# Altium PCB ArrowHheldPCB.PcbDoc
Units mm, origin at the board's own origin, x right, y up, seen from the top; angles counter-clockwise.
Board outline 40 x 55 mm, 2 copper layers (Top Layer, Bottom Layer), stack 1.569 mm thick; 42 components, 37 nets, 157 pads, 81 vias.
Unrouted connection lines stored in the file: 20.
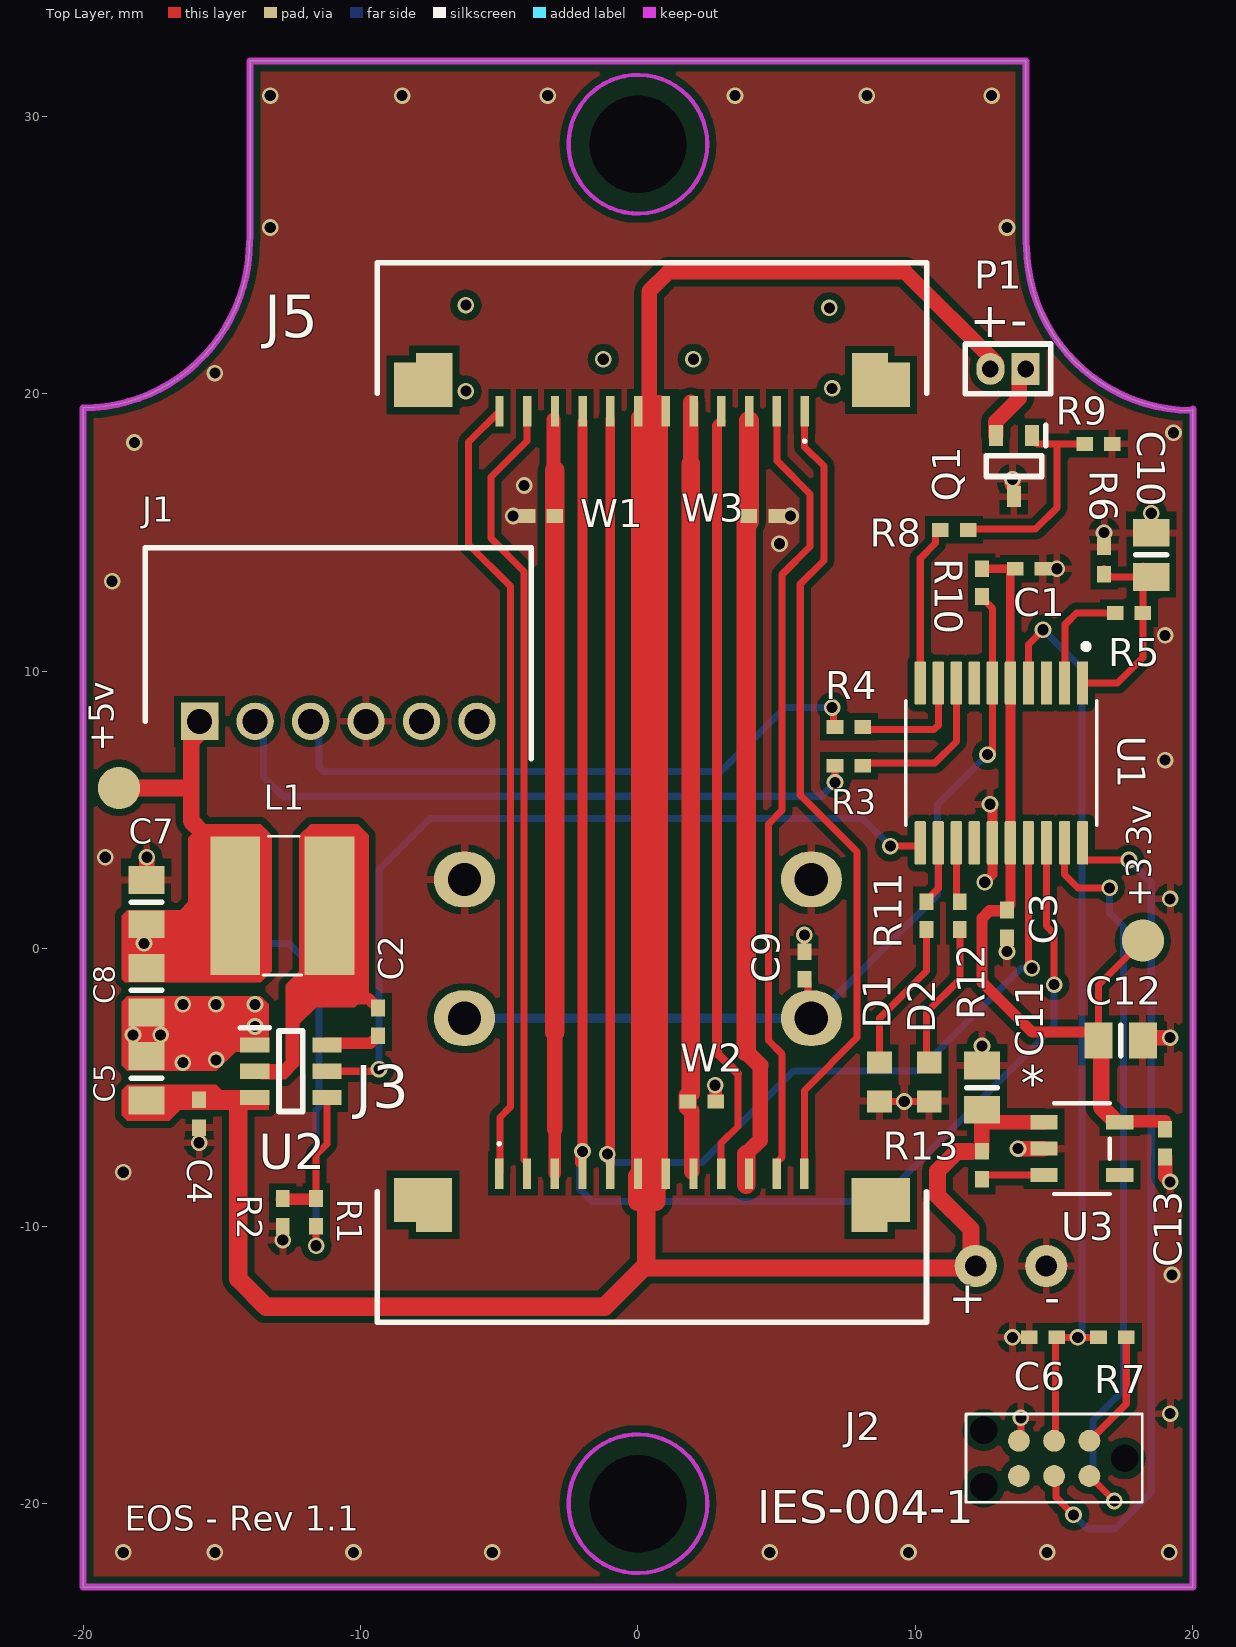
[diagram p0: Top Layer view]
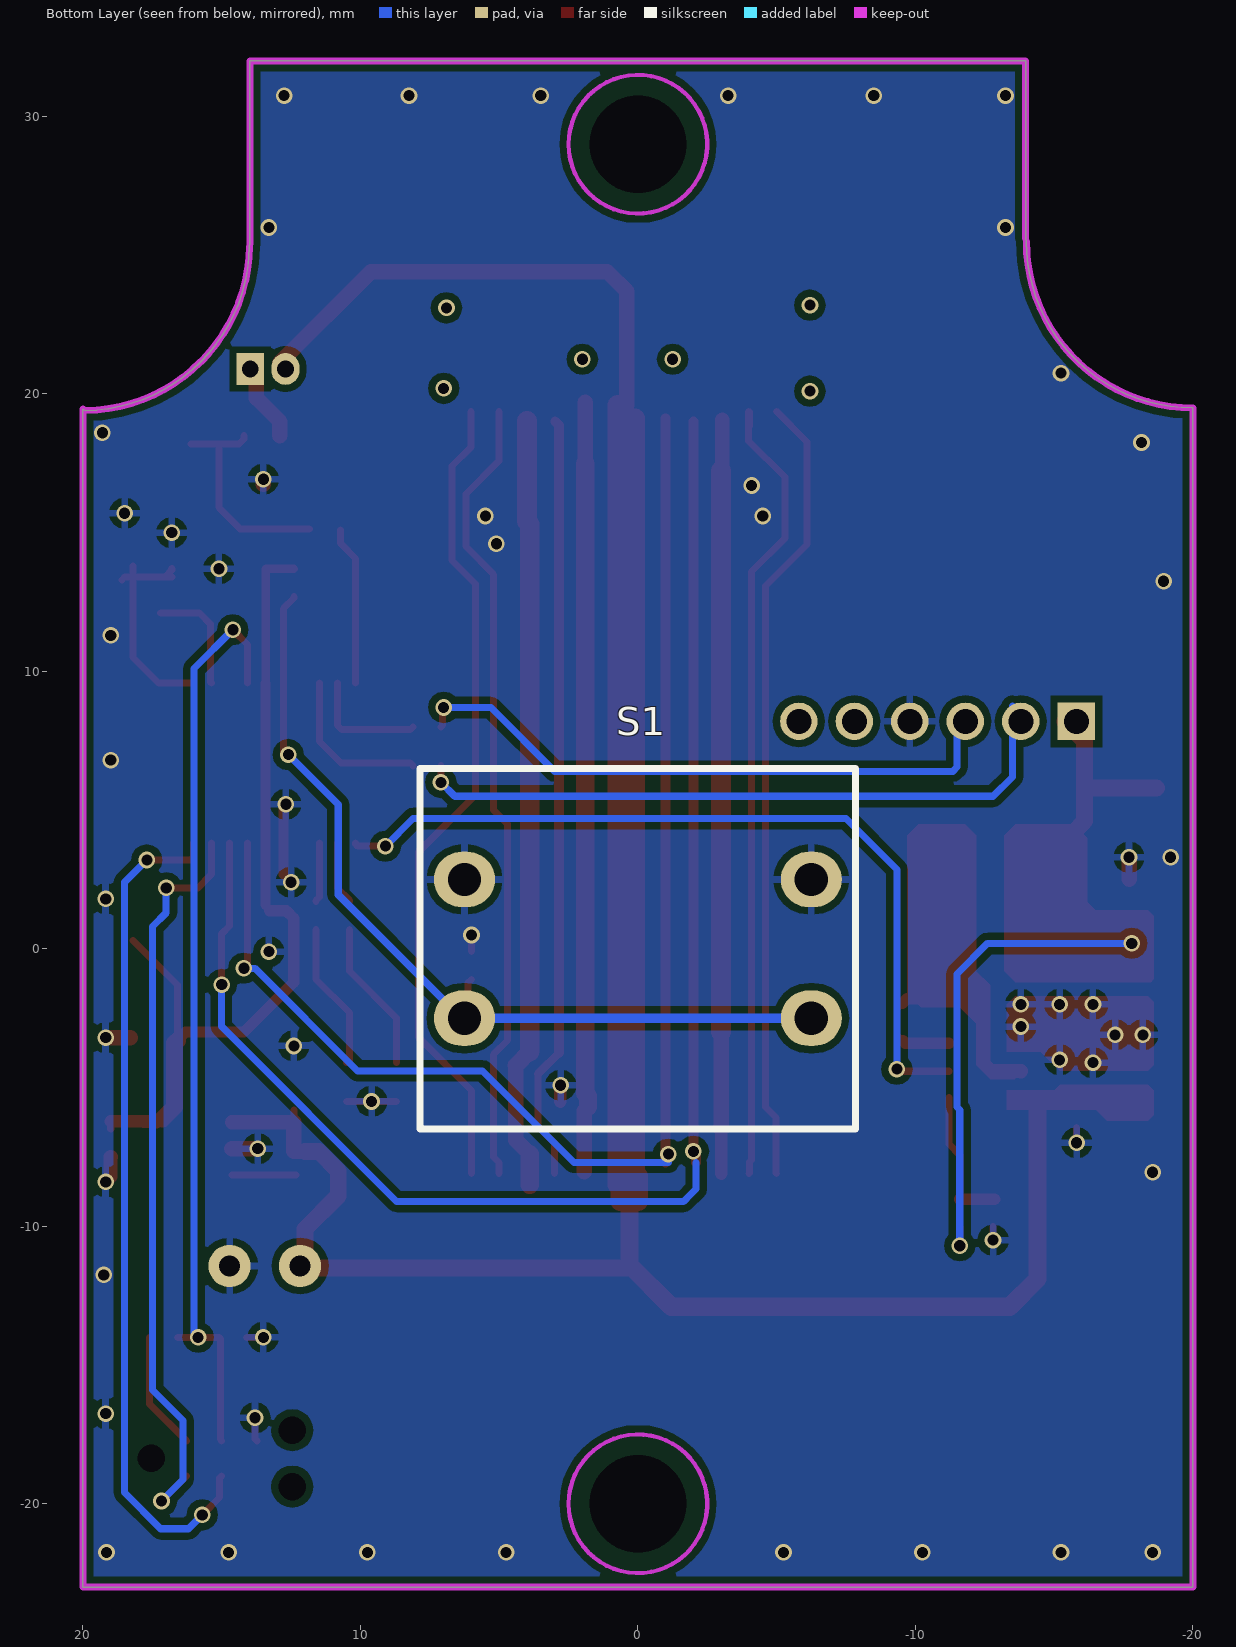
[diagram p1: Bottom Layer view, seen from below]

## Layer stack, top to bottom
Top Solder: solder mask 0.0254, SM-001, Dk 4
Top Layer: signal copper 0.035
Dielectric 1: core 1.4986, Core-043, Dk 4.3
Bottom Layer: signal copper 0.035
Bottom Solder: solder mask 0.0254, SM-001, Dk 4

## Board outline
-20,-23 -20,19.47 -20.001,19.497 ccw(c-20,25.497) -14,25.497 -13.975,25.6 -13.975,32 13.981,32 13.981,25.401 14.001,25.32 ccw(c20,25.4) 19.919,19.401 20,19.45 20,-23

## Design rules (kind name [scope] priority, off if disabled: settings)
Clearance [All] p1: gap=0.254 ignorepadtopadclearanceinfootprint=FALSE except(0: Arc-Hole Track-Hole SMDPad-Hole THPad-Hole Via-Hole Fill-Hole Poly-Hole Region-Hole Text-Hole; 0.203: Arc-Arc Arc-Track Arc-SMDPad Arc-THPad Track-Track Track-SMDPad Track-THPad SMDPad-SMDPad SMDPad-THPad)
PolygonConnect [All] p1: connectstyle=Relief reliefconductorwidth=0.254 reliefentries=4 polygonreliefangle="90 Angle" airgapwidth=0.254
RoutingVias [All] p1: holewidth=0.711 width=1.27 viastyle="Through Hole" minholewidth=0.711 minwidth=1.27 maxholewidth=0.711 maxwidth=1.27
SolderMaskExpansion [All] p1: expansion=0.102 istentingtop=FALSE
Width [All] p1: maxlimit=1.016 minlimit=0.203 preferedwidth=0.254 minimp=50.000000 maximp=50.000000 favimp=50.000000
30 further rules are at their usual default settings.

## Components (designator, comment, footprint, x,y, rotation, side; value= is the part's Value field where it differs from the comment)
C1 "" 0402 14.1,13.7 r0 top value=0.1uF
C2 "" 0402 -9.366,-2.633 r270 top value=100nF
C3 "" 0402 13.3,0.9 r270 top value=0.1uF
C4 "" 0402 -15.813,-5.943 r90 top value=0.1uF
C5 "" 6-0805_L -17.718,-4.665 r270 top value=10uF
C6 "" 0402 14.6,-14 r180 top value=0.1uF
C7 "" 6-0805_L -17.718,1.685 r90 top value=22uF
C8 "" 6-0805_L -17.718,-1.49 r270 top value=22uF
C9 "" 0402 6,-0.6 r90 top value=0.1uF
C10 "" 6-0805_L 18.5,14.2 r270 top value=10uF
C11 "" 6-0805_L 12.4,-5 r270 top value=10uF
C12 "" 6-0805_L 17.4,-3.3 r180 top value=10uF
C13 "" 0402 19,-7 r90 top value=0.1uF
D1 "" 1608[0603] 8.7,-4.8 r270 top
D2 "" 1608[0603] 10.5,-4.8 r270 top
J1 "JST 6 PIN" SHDRRA6W50P0X200_1X6_1390X760X480P -15.8,8.2 r0 top
J2 "TC2030-MCP-NL-10" TC2030MCPNL10 15,-18.164 r180 top
J3 "F52R-1A7H1-11012" F52R1A7H111012 0.5,-11.1 r0 top
J5 "F52R-1A7H1-11012" F52R1A7H111012 0.508,22.375 r180 top
L1 "" TYS50404R7N10 -11.114,1.658 r180 top value=4.7uH
P1 "Laser" MHDR1X2 13.972,20.9 r180 top
Q1 "NMOS" SOT65P210X100-3N 13.55,17.4 r270 top
R1 "" 0402 -11.6,-9.5 r270 top value=52.3K
R2 "" 0402 -12.8,-9.5 r270 top value=10K
R3 "" 0402 7.6,6.6 r180 top value=0R
R4 "" 0402 7.6,8 r180 top value=0R
R5 "" 0402 17.7,12.1 r180 top value=1K
R6 "" 0402 16.8,14 r270 top value=1M
R7 "" 0402 17.1,-14 r0 top value=10K
R8 "" 0402 11.4,15.1 r0 top value=1K
R9 "" 0402 16.6,18.2 r180 top value=100K
R10 "" 0402 12.4,13.2 r90 top value=100K
R11 "" 0402 10.4,1.2 r90 top value=1K
R12 "" 0402 11.6,1.2 r90 top value=1K
R13 "" 0402 12.4,-7.8 r270 top value=10K
S1 "SW-PB" 430456085736 0,0 r0 bottom
U1 "STM32L031F6P6" SOP65P640X120-20N 13.1,6.7 r270 top
U2 "AP62200WU-7" SOT95P280X100-6N -12.511,-4.411 r0 top
U3 "MIC5203-3.3YM5-TR" SOT-23-5_M5_MCH 16,-7.2 r0 top
W1 "" 0402 -3.5,15.6 r180 top
W2 "" 0402 2.3,-5.5 r0 top
W3 "" 0402 4.5,15.6 r0 top

## Footprints (in the part's own frame and the unit in brackets; to place one, negate y for a bottom-side part, rotate by r counter-clockwise, add the part's x,y. Pads: shape width x height; smd on the part's side, far side on the other; paste and mask are expansions set on the pad)
6-0805_L [mm] "Chip Resistor, Body 2.0x1.2mm, IPC High Density"
  rect 1x1.3 smd: 1(-0.8,0) 2(0.8,0)
  silkscreen extent 0,-0.55 0,0.55, body extent -1.07,-0.7 1.07,0.7, height 0.7
0402 [mm] "Chip Capacitor, Body 1.0x0.5mm, IPC High Density"
  rect 0.6x0.5 smd: 1(-0.5,0) 2(0.5,0)
  body extent -0.55,-0.3 0.55,0.3, height 1.3
1608[0603] [mm] "Chip Capacitor, Body 1.6x0.8mm, IPC High Density"
  rect 0.8x0.9 smd: 1(-0.7,0) 2(0.7,0)
  body extent -0.87,-0.48 0.87,0.48, height 1.3
430456085736 [mm]
  oval 2.2x2 hole 1.2: 1(-6.25,2.5) 1(6.25,2.5) 2(-6.25,-2.5) 2(6.25,-2.5)
  silkscreen extent -7.85,-6.5 7.85,6.5, body extent -6.99,-6 6.99,6, height 8.7
F52R1A7H111012 [mm]
  rect 0.3x1.1 smd: 1(-5.5,3) 2(-4.5,3) 3(-3.5,3) 4(-2.5,3) 5(-1.5,3) 6(-0.5,3) 7(0.5,3) 8(1.5,3) 9(2.5,3) 10(3.5,3) 11(4.5,3) 12(5.5,3)
  rect 2.1x1.6 smd: MP1(-8.25,2.05) MP2(8.25,2.05)
  rect 1.3x0.35 smd: MP1(-7.85,1.075) MP2(7.85,1.075)
  silkscreen extent -9.9,-2.35 9.9,4.13
MHDR1X2 [mm] "Connector; Header; 2 Position"
  rect 1x1.143 hole 0.6: 1(0,0)
  oval 1.016x1.143 hole 0.6: 2(1.27,0)
  silkscreen extent -0.9,-0.9 2.17,0.9
SHDRRA6W50P0X200_1X6_1390X760X480P [mm]
  rect 1.35x1.35 hole 0.9: 1(0,0)
  round 1.35 hole 0.9: 2(2,0) 3(4,0) 4(6,0) 5(8,0) 6(10,0)
  silkscreen extent -1.95,-1.35 11.95,6.25, body extent -1.95,-1.35 11.95,6.25, height 4.8
SOP65P640X120-20N [mm]
  rrect20% 1.56x0.41 smd: 1(-2.88,2.925) 2(-2.88,2.275) 3(-2.88,1.625) 4(-2.88,0.975) 5(-2.88,0.325) 6(-2.88,-0.325) 7(-2.88,-0.975) 8(-2.88,-1.625) 9(-2.88,-2.275) 10(-2.88,-2.925) 11(2.88,-2.925) 12(2.88,-2.275) 13(2.88,-1.625) 14(2.88,-0.975) 15(2.88,-0.325) 16(2.88,0.325) 17(2.88,0.975) 18(2.88,1.625) 19(2.88,2.275) 20(2.88,2.925)
  silkscreen extent -4.3,-3.44 2.25,3.44
SOT65P210X100-3N [mm]
  rect 0.75x0.5 smd: 1(-1.1,-0.65) 2(-1.1,0.65) 3(1.1,0)
  silkscreen extent -1.48,-1 0.38,1.15, body extent -1.05,-1 1.05,1, height 1
SOT95P280X100-6N [mm]
  rect 1.05x0.55 smd: 1(-1.3,0.95) 2(-1.3,0) 3(-1.3,-0.95) 4(1.3,-0.95) 5(1.3,0) 6(1.3,0.95)
  silkscreen extent -1.83,-1.45 0.43,1.58, body extent -1.4,-1.45 1.4,1.45, height 1
SOT-23-5_M5_MCH [mil]
  rect 38.5x20 smd paste+0 mask+0: 1(-53.75,37.4) 2(-53.75,0) 3(-53.75,-37.4) 4(53.75,-37.4) 5(53.75,37.4)
  silkscreen extent -40,-64 40,64, body extent -59,-59 59,59, height 51
TC2030MCPNL10 [mm]
  round 0.787 smd: 1(-1.27,-0.434) 2(-1.27,0.836) 3(0,-0.434) 4(0,0.836) 5(1.27,-0.434) 6(1.27,0.836)
  round 0.495 hole 0.991 unplated: 7(-2.54,0.201) 8(2.54,1.217) 9(2.54,-0.815)
  silkscreen extent -3.18,-1.4 3.17,1.78
TYS50404R7N10 [mm]
  rect 1.8x5 smd: 1(0,0.1) 2(3.4,0.1)
  silkscreen extent 1,-2.4 2.4,2.6, body extent -0.8,-2.4 4.2,2.6, height 4.3

## Part data
C1 C2 C3 C4 C5 C6 C7 C8 C9 C10 C11 C12 C13: library part Cap, "Capacitor", LatestRevisionDate=17-Jul-2002, LatestRevisionNote="Re-released for DXP Platform.", PackageDescription="Radial Cap, Thru-Hole; 2 Leads; 0.3 in Pin Spacing", PackageReference=RAD-0.3, Published=8-Jun-2000, Publisher="Altium Limited"
  C3 C4 C6 C9 C13: P/N=CL05A104KA5NNNC
D1 D2: library part LED0, "Typical INFRARED GaAs LED", LatestRevisionDate=08-Jul-2005, LatestRevisionNote="Mech Layer 1 removed.", PackageDescription="LED; 2 Leads", PackageReference=LED-0, Published=8-Jun-2000, Publisher="Altium Limited"
J1: library part S6B-PH-K-S_LF__SN_, "Connector", Arrow Part Number=S6B-PH-K-S(LF)(SN), Manufacturer_Name="JST (JAPAN SOLDERLESS TERMINALS)", Arrow Price/Stock=https://www.arrow.com/en/products/s6b-ph-k-s-lf-sn/jst-manufacturing?region=nac, Datasheet Link=http://www.jst-mfg.com/product/pdf/eng/ePH.pdf, Height=4.8mm, Manufacturer_Part_Number=S6B-PH-K-S(LF)(SN)
J2: "Connector", Manufacturer_Name="Tag Connect", Datasheet Link=https://datasheet.datasheetarchive.com/originals/distributors/Datasheets_SAMA/69d9de5c4f3ef6f122772fd5d7b0f8ab.pdf, Height=18mm, Manufacturer_Part_Number=TC2030-MCP-NL-10
J3 J5: "Connector", Manufacturer_Name="AMPHENOL COMMUNICATION SOLUTIONS", Arrow Part Number=F52R-1A7H1-11012, Arrow Price/Stock=https://www.arrow.com/en/products/f52r-1a7h1-11012/amphenol-fci?region=nac, Datasheet Link=https://cdn.amphenol-cs.com/media/wysiwyg/files/drawing/f52r.pdf, Height=2.2mm, Manufacturer_Part_Number=F52R-1A7H1-11012
L1: library part Inductor, "Inductor", Code_IEC=1005, Code_JEITA=0402, LatestRevisionDate=29-May-2009, LatestRevisionNote="IPC-7351 Footprint Added.", PackageDescription="Chip Inductor", PackageReference=0402-A, Published=8-Jun-2000, Publisher="Altium Limited"
P1: library part MHDR1X2, "Header, 2-Pin", LatestRevisionDate=17-Jul-2002, LatestRevisionNote="Re-released for DXP Platform.", Publisher="Altium Limited"
Q1: library part MOSFET-N, "N-Channel MOSFETBSS214NWH6327XTSA1", LatestRevisionDate=17-Jul-2002, LatestRevisionNote="Re-released for DXP Platform.", PackageDescription="TO, Flat Index; 3 In-Line, Axial Leads; Body Dia. 4.6mm; Lead Dia. 0.5 mm (max)", PackageReference=E3, PackageVersion=1995/1996, Published=8-Jun-2000, Publisher="Altium Limited"
R1 R2 R3 R4 R5 R6 R7 R8 R9 R10 R11 R12 R13: library part "Res Semi", "Semiconductor Resistor", LatestRevisionDate=17-Jul-2002, LatestRevisionNote="Re-released for DXP Platform.", PackageDescription="Axial Device, Thru-Hole; 2 Leads; 0.5 in Pin Spacing", PackageReference=AXIAL-0.5, Published=8-Jun-2000, Publisher="Altium Limited"
S1: "Switch", LatestRevisionDate=17-Jul-2002, LatestRevisionNote="Re-released for DXP Platform.", PackageDescription="Switch; 2 Leads", PackageReference=SPST-2, Published=24-Mar-1999, Publisher="Altium Limited"
U1: "Ultra-low-power ARM Cortex-M0+ MCU with 32-Kbytes Flash, 32 MHz CPU", Package=None, Availability=Unavailable, MF="{'manufacturer': u'STMicroelectronics'}", MP=STM32L031F6P6, Price=None
U2: "Integrated Circuit", Manufacturer_Name="Diodes Inc.", Mouser Part Number=621-AP62200WU-7, Arrow Part Number=AP62200WU-7, Arrow Price/Stock=https://www.arrow.com/en/products/ap62200wu-7/diodes-incorporated?region=nac, Datasheet Link=https://datasheet.datasheetarchive.com/originals/distributors/Datasheets_SAMA/8773719cd56c9c8fb48ffd720a0376ce.pdf, Height=1mm, Manufacturer_Part_Number=AP62200WU-7, Mouser Price/Stock=https://www.mouser.co.uk/ProductDetail/Diodes-Incorporated/AP62200WU-7?qs=P1JMDcb91o6Lrrt3Idazjw%3D%3D
U3: "No Description Available", Mfr_Name=Microchip, Copyright="Copyright (C) 2022 Ultra Librarian. All rights reserved.", Digi-Key_Part_Number_1=576-2728-1-ND, Digi-Key_Part_Number_2=576-2728-2-ND, Digi-Key_Part_Number_3=576-2728-6-ND, Manufacturer_Part_Number=MIC5203-3.3YM5-TR, RefDes=RefDes, Type=DEV
W1 W2 W3: library part Jumper, "Jumper Wire", LatestRevisionDate=17-Jul-2002, LatestRevisionNote="Re-released for DXP Platform.", PackageDescription="Radial Cap, Thru-Hole; 2 Leads; 0.2 in Pin Spacing", PackageReference=RAD-0.2, Published=24-Mar-1999, Publisher="Altium Limited"

## Free pads (board coordinates)
  oval 0x1.524 hole 3.5: 6(0,-20) 7(0,29)
  round 1.524 hole 0.762: 8(12.176,-11.43) 9(14.716,-11.43)
  round 1.524 smd: 10(-18.7,5.8) 10(18.2,0.3)

## Via types
v1: diameter 0.6, hole 0.4, Top Layer to Bottom Layer, tented both sides, 81 vias

## Nets (pads, with @x,y where several pads share a name; then routed paths per layer and width w, separated by ;. In a path a pad name is that pad's centre, name@x,y a point inside that pad or via, vN(x,y) a via of type N, cw(c..) or ccw(c..) an arc to the next point about the centre after c; other vN are vias at no path point)
5V: C7.1 C8.1 J1.1 L1.2 pad.10@-18.7,5.8 R1.2 | length 27.7
  Top Layer w0.254: v1(-11.6,-10.7) R1.2
  Top Layer w0.61: pad.10@-18.7,5.8 -16.1,5.8 ; J1.1@-15.4,8.2 -16.1,7.5 -16.1,5.8 ; L1.2 -14.514,3.158 -15.109,3.753 -15.553,3.753 -15.7,3.9 -15.7,4.2 -16.1,4.6 -16.1,5.8
  Bottom Layer w0.254: v1(-17.8,0.2) -12.6,0.2 -11.5,-0.9 -11.5,-5.703 -11.6,-5.803 v1(-11.6,-10.7)
BAT_NTC: J3.9 J5.4 | length 27.7
  Top Layer w0.254: J3.9 3,-7 3.6,-6.4 3.6,-4.5
  Top Layer w0.305: 2.85,-3.75 3.6,-4.5
  Top Layer w0.356: 2.85,-3.75 2.85,18.873 J5.4@2.98,19.003
BOOT0: C10.2 R5.1 R6.2 U1.1 | length 8.1
  Top Layer w0.254: U1.1 17.28,9.58 18.2,10.5 R5.1 C10.2@18.2,13.4 ; R6.2@16.8,13.4 17.05,13.4 ; R6.2@16.8,13.7 16.8,13.65 17.05,13.4 ; C10.2@18.2,13.8 C10.2@18.2,13.4 ; C10.2@18.6,13.3 C10.2 C10.2@18.2,13.4 ; 17.05,13.4 C10.2@18.2,13.4
BOOT0-CTRL: R5.2 U1.2 | length 4.1
  Top Layer w0.254: U1.2 15.4,9.605 15.4,11.7 15.8,12.1 R5.2
BTN: C9.1 R10.1 S1.1 U1.6 | length 32.6
  Top Layer w0.254: C9.1 6.123,-1.223 6.123,-2.373 6.25,-2.5 S1.1@6.7,-2.5 ; R10.1 12.4,12.65 12.775,12.275 U1.6 v1@12.775,7
  Bottom Layer w0.254: S1.1@6.25,-2.5 6.35,-2.5 10.8,1.95 10.8,5.2 v1(12.6,7) v1@12.7,7.1
  Bottom Layer w0.356: S1.1@-6.25,-2.5 S1.1@6.25,-2.5
BUCK_EN: U1.11 U2.5 | length 29.9
  Top Layer w0.254: U2.5 -9.411,-4.411 v1(-9.333,-4.333) ; v1(9.1,3.7) 10.097,3.7 10.175,3.778 U1.11
  Bottom Layer w0.254: v1(-9.333,-4.333) -9.333,2.867 -7.5,4.7 8.1,4.7 v1(9.1,3.7)
DGND1: J3.10 J5.3 W3.1 | length 28
  Top Layer w0.559: 3.9,-7.4 4.4,-6.9 4.4,-6.2 4.4,-4.2
  Top Layer w0.61: 3.9,-3.7 4.4,-4.2
  Top Layer w0.66: J3.10@3.9,-8.5 3.9,-8.1 3.9,-7.4
  Top Layer w0.711: 3.9,-3.7 3.9,15.304 4,15.404 W3.1 4,15.7 J5.3@4,19.038
DGND2: J3.3 J5.10 W1.1 | length 27.2
  Top Layer w0.254: -3.139,17.284 -3.099,17.244 ; -3.1,-3 -3.099,-2.999 ; -3.099,-6.5 -3,-6.599
  Top Layer w0.457: J3.3 -3,-6.599
  Top Layer w0.508: -3.039,17.284 J5.10@-3.039,19.069
  Top Layer w0.559: -2.999,-6.5 -2.999,-2.999
  Top Layer w0.711: -2.999,-2.999 -2.999,15.7 -2.999,17.244
GND: C1.2 C3.2 C4.1 C5.1 C6.2 C7.2 C8.2 C9.2 C10.1 C11.1 C12.1 C13.1 D1.2 D2.2 J1.4 J2.5 pad.9 Q1.3 R2.2 R6.1 R9.1 S1.2 U1.15 U2.1 U3.2 W1.2 W2.2 W3.2 | length 12.5
  Top Layer w0.254: C7.2 C7.2@-17.7,2.503 ; C4.1 v1(-15.813,-6.987) v1@-15.8,-7 ; v1(-12.8,-10.5) R2.2 ; C9.2 v1(6,0.5) ; D1.2 D2.2 ; v1@12.6,5.3 v1@12.775,5.125 ; v1(13.5,-14) C6.2 ; J2.5 13.8,-17.66 v1(13.8,-16.9) ; C12.1 C12.1@18.3,-3.2
  Top Layer w0.356: v1(12.5,2.4) 12.775,2.675 U1.15 v1@12.775,5.125
  Top Layer w0.457: W2.2 v1@2.8,-4.9
  Top Layer w0.508: C13.1 19.004,-7.504 19.004,-8.198 19.181,-8.375 v1(19.181,-8.4)
  Top Layer w0.559: C7.2@-17.7,2.503 v1(-17.7,3.3) ; v1@13.5,16.75 v1(13.5,16.925) ; v1(13.7,-7.2) U3.2 ; C12.1@18.3,-3.2 18.308,-3.208 19.173,-3.208 v1(19.181,-3.2)
  other v1: -18.55,-21.75 -15.25,-21.75 -10.25,-21.75 -5.25,-21.75 4.75,-21.75 9.75,-21.75 14.75,-21.75 19.15,-21.75 19.181,-16.75 19.25,-11.75 -18.55,-8.05 9.6,-5.5 2.784,-4.916 -16.4,-4.1 -15.2,-4 12.4,-3.5 -18.2,-3.1 -17.2,-3.1 -13.8,-2.8 -16.4,-2 -15.2,-2 -13.8,-2 13.3,-0.1 19.181,1.8 -19.2,3.3 12.688,5.212 19,6.8 19,11.3 -18.95,13.25 15.1,13.7 5.1,14.6 16.8,15 -4.5,15.6 5.5,15.6 18.5,15.7 -4.1,16.7 -18.15,18.25 19.3,18.6 -15.25,20.75 -13.25,26 13.3,26 -13.25,30.75 -8.5,30.75 -3.25,30.75 3.5,30.75 8.25,30.75 12.75,30.75
LASER_EN: R8.1 U1.10 | length 5.7
  Top Layer w0.254: U1.10 10.175,14.075 10.727,14.627 R8.1@10.727,15.1
LED0: R11.2 U1.12 | length 2.3
  Top Layer w0.254: R11.2 10.4,1.75 10.825,2.175 U1.12
LED1: R12.2 U1.13 | length 2.2
  Top Layer w0.254: U1.13 11.475,1.875 11.6,1.75 R12.2
MCU_CLK: J2.4 U1.20 | length 30.6
  Top Layer w0.254: J2.4 15.075,-19.075 15.075,-19.775 v1(15.7,-20.4) ; U1.20 16.025,3.286 16.111,3.2 v1(17.7,3.2)
  Bottom Layer w0.254: v1(15.7,-20.4) 16.2,-20.9 17.2,-20.9 18.5,-19.6 18.5,2.4 v1(17.7,3.2)
MCU_NRST: C6.1 J2.3 R7.1 U1.4 | length 33.6
  Top Layer w0.254: U1.4 14.075,10.975 v1(14.6,11.5) ; J2.3 15.05,-17.68 15.05,-14.05 C6.1 v1(15.85,-14) R7.1
  Bottom Layer w0.254: v1(14.6,11.5) 16,10.1 16,-13.85 v1(15.85,-14)
MCU_SWD: J2.2 U1.19 | length 27.3
  Top Layer w0.254: U1.19 15.375,2.679 15.854,2.2 v1(17,2.2) ; J2.2 v1(17.17,-19.9)
  Bottom Layer w0.254: v1(17,2.2) 17,1.3 17.5,0.8 17.5,-15.9 16.4,-17 16.4,-19.13 v1(17.17,-19.9)
NetC2_1: C2.1 L1.1 U2.2 | length 16.7
  Top Layer w0.254: -12.8,-4.4 -12.4,-4 -12.4,-1.328 L1.1@-11.114,-0.042 ; L1.1 L1.1@-11.114,-0.042 ; L1.1@-10.341,-0.815 L1.1@-11.114,-0.042 ; C2.1@-9.539,-1.96 -9.489,-1.96 -9.366,-2.083 C2.1
  Top Layer w0.406: -11.257,-1.8 -9.699,-1.8 C2.1@-9.539,-1.96 ; L1.1 -10.157,2.515 -10.341,-0.815 -10.341,-1.416 -9.957,-1.8
  Top Layer w0.508: U2.2 -13.8,-4.4 -12.8,-4.4
NetC2_2: C2.2 U2.6 | length 2.1
  Top Layer w0.254: U2.6 U2.6@-11.15,-3.4 ; C2.2@-9.544,-3.306 -9.489,-3.306 -9.366,-3.183 C2.2
  Top Layer w0.406: U2.6@-11.211,-3.4 -11.15,-3.4 -9.638,-3.4 C2.2@-9.544,-3.306
NetD1_1: D1.1 R11.1 | length 5.5
  Top Layer w0.254: D1.1 8.7,-2.5 10.4,-0.8 R11.1
NetD2_1: D2.1 R12.1 | length 5.3
  Top Layer w0.254: D2.1 10.4,-4 10.4,-2.3 11.6,-1.1 R12.1
NetP1_1: P1.1 Q1.1 | length 3
  Top Layer w0.254: P1.1 P1.1@14.071,20.8
  Top Layer w0.559: Q1.1 12.9,19 13.751,19.851 13.751,20.608 13.943,20.8 P1.1@14.071,20.8
NetQ1_2: Q1.2 R8.2 R9.2 | length 8
  Top Layer w0.254: R8.2@11.832,15.132 14.332,15.132 15.1,15.9 15.1,18.2 ; Q1.2 14.2,18.375 14.375,18.2 15.1,18.2 ; R9.2 15.1,18.2
NetR1_1: R1.1 R2.1 U2.4 | length 5.1
  Top Layer w0.254: R2.1@-12.867,-9.018 R2.1@-12.863,-9.022 ; R1.1 -11.6,-7.424 -11.211,-7.035 U2.4 ; R1.1@-11.593,-9.022 -11.589,-9.026 R1.1@-11.589,-8.976
  Top Layer w0.406: R2.1@-12.863,-9.022 R1.1@-11.593,-9.022
NetR13_2: R13.2 U3.3 | length 2.3
  Top Layer w0.254: R13.2@12.323,-8.15 U3.3
RX_Luna: J1.2 R3.2 | length 24.2
  Top Layer w0.254: v1(7.1,6) R3.2
  Bottom Layer w0.254: J1.2@-13.495,8.745 -13.495,6.195 -12.8,5.5 6.6,5.5 v1(7.1,6)
RXD: R4.1 U1.9 | length 4.4
  Top Layer w0.254: R4.1 8.2,7.9 10.676,7.9 10.825,8.049 U1.9
SCL_Main: J3.5 J5.8 U1.17 | length 49.6
  Top Layer w0.254: U1.17 14.075,-0.575 v1(14.2,-0.7)
  Top Layer w0.356: J3.5@-1,-7.7 J5.8@-1,19.125
  Bottom Layer w0.254: -1.1,-7.7 2.3,-7.7 5.6,-4.4 10.1,-4.4 13.8,-0.7 v1(14.2,-0.7)
  other v1: -1.1,-7.4
SDA_Main: J3.4 J5.9 U1.18 | length 54.3
  Top Layer w0.254: U1.18 14.725,0.818 15,0.543 v1(15,-1.288)
  Top Layer w0.356: J3.4@-2.099,-7.7 v1@-2.099,-7.3 ; v1(-2,-7.3) J5.9@-2,19.003
  Bottom Layer w0.254: -2.1,-7.7 -2.1,-8.651 -1.876,-8.876 -1.651,-9.1 8.7,-9.1 15,-2.8 v1(15,-1.288)
SIG1: J3.12 J5.1 | length 29.7
  Top Layer w0.254: J3.12 6,-5.1 7.9,-3.2 7.9,3.5 5.85,5.55 5.85,13.15 6.7,14 6.7,17.4 6.008,18.092 J5.1
SIG2: J3.11 J5.2 | length 28.9
  Top Layer w0.254: J3.11 5,-7.7 5.2,-7.5 5.2,-3.8 4.7,-3.3 4.7,4.5 5.2,5 5.2,13.5 6.2,14.5 6.2,16.4 5.008,17.592 J5.2
SIG3: J3.2 J5.11 | length 29.1
  Top Layer w0.254: J5.11@-4.015,18.838 -4.015,19.352 J5.11 -3.992,18.308 -5.3,17 -5.3,14.8 -4.1,13.6 -4.1,-7.6 -4.023,-7.677 -4.023,-8.077 J3.2
SIG4: J3.1 J5.12 | length 28.7
  Top Layer w0.254: J3.1 -4.977,-8.077 -4.977,-6.077 -4.6,-5.7 -4.6,13.074 -6.1,14.574 -6.1,18.267 J5.12
TX_Luna: J1.3 R4.2 | length 22.1
  Top Layer w0.254: v1(7,8.7) 7.05,8.65 7.05,8.05 R4.2
  Bottom Layer w0.254: J1.3@-11.5,8.364 -11.5,6.549 -11.351,6.4 3,6.4 5.3,8.7 v1(7,8.7)
TXD: R3.1 U1.8 | length 5.8
  Top Layer w0.254: R3.1 8.2,6.7 10.7,6.7 11.475,7.475 U1.8
V3.3: J2.1 R7.2 | length 4.3
  Top Layer w0.254: J2.1 17.6,-16.4 R7.2
VBAT: C4.2 C5.2 C11.2 J3.6 J3.7 J5.6 J5.7 P1.2 pad.8 R13.1 U2.3 U3.1 | length 125.5
  Top Layer w0.254: C5.2 -17.614,-5.361 -15.813,-5.361 -14.4,-5.361 U2.3 -13.616,-5.361 U2.3@-13.616,-5.556 ; C11.2@12.4,-6.25 C11.2
  Top Layer w0.508: C11.2@12.4,-6.25 U3.1
  Top Layer w0.559: 0.4,19.6 0.4,23.7 1.1,24.4 9.63,24.4 P1.2@12.916,21.114 ; 12.001,-7.3 R13.1 C11.2@12.4,-6.25
  Top Layer w0.61: 0.3,-11.4 0.399,-11.499 12.001,-11.499 12.001,-10.101 10.8,-8.9 10.8,-8 11.5,-7.3 12.001,-7.3
  Top Layer w0.66: -14.4,-5.5 -14.4,-11.9 -13.4,-12.9 -1.2,-12.9 0.3,-11.4 0.3,-9.1
  Top Layer w0.711: 0,-9.1 J3.6@0,-8.2 ; J3.6@0.1,-8.1 J5.7@0.1,19.125 ; 0.637,-9.1 0.637,-8.2 ; 0.737,-8.5 0.737,-8.1 0.737,19.375 0.737,19.6
VBAT-: J3.8 J5.5 W2.1 | length 27.7
  Top Layer w0.254: 1.86,17.529 1.899,17.489
  Top Layer w0.559: 1.899,17.489 J5.5@1.899,19.7 ; J3.8@1.939,-8.039 1.939,-5.836
  Top Layer w0.66: W2.1@1.8,-5.696 W2.1 1.8,-5.304 1.899,-5.204 1.899,17.489
VCC: C1.1 C3.1 C12.2 C13.2 pad.10@18.2,0.3 R10.2 U1.5 U1.16 U3.5 | length 31.2
  Top Layer w0.254: C3.1@13.277,1.423 C3.1@13.425,1.572 ; U1.5@13.413,9.593 U1.5 ; C12.2 16.6,-3.297 16.6,-1.3 pad.10@18.2,0.3 ; U3.5@17.133,-6.135 17.25,-6.135 U3.5 ; C13.2 C13.2@19,-6.217
  Top Layer w0.305: R10.2 13.413,13.7 U1.5@13.413,9.593
  Top Layer w0.356: C3.1@13.425,1.572 U1.16 U1.5
  Top Layer w0.406: C3.1@13.277,1.373 12.673,1.373 12.4,1.1 12.4,-1.2 14.2,-3 16.303,-3 C12.2@16.6,-3.297
  Top Layer w0.457: U3.5 17.391,-6.225 17.81,-6.225 17.818,-6.217 C13.2@19,-6.217
  Top Layer w0.61: C12.2 16.7,-3.4 16.7,-5.702 U3.5@17.133,-6.135
pads on no net: J1.5 J1.6 J2.6 J2.7 J2.8 J2.9 J3.MP1 J3.MP2 J5.MP1 J5.MP2 U1.3 U1.7 U1.14 U3.4
copper on no net:
  other v1: -6.2,20.1 7,20.2 -1.25,21.25 2,21.25 6.9,23.1 -6.2,23.2

## Polygon pours and split planes (outlines as drawn)
GND on Top Layer "GND_L01_P000" (solid, remove dead copper, pour order 0): 20.6,19.821 17.65,19.821 14.15,23.321 14.15,31.821 13.9,32.071 -15.1,32.071 -15.1,23.821 -19.35,19.571 -22.1,19.571 -22.1,-22.929 20.9,-22.929 20.9,19.521
GND on Bottom Layer "GND_L02_P001" (solid, remove dead copper, pour order 1): 21.1,19.9 18.15,19.9 14.65,23.4 14.65,31.9 14.4,32.15 -14.6,32.15 -14.6,23.9 -18.85,19.65 -21.6,19.65 -21.6,-22.85 21.4,-22.85 21.4,19.6

## Keep-outs
Keep-Out Layer:
  circle w0.152: c0,29 r2.5
  circle w0.152: c0,-20 r2.5
  lines w0.254: -20.001,19.497 ccw(c-20,25.497) -14,25.497 ; -20,19.47 -20,18.01 -20,-23 20,-23 20,19.45 ; -13.975,25.6 -13.975,32 13.981,32 13.981,25.401 ; 14.001,25.32 ccw(c20,25.4) 19.919,19.401

## Other copper
Top Layer:
  pour cut-out: 0,-20
  region net 5V: -13.6,-1.2 -13.2,-0.8 -13.2,4.1 -13.6,4.5 -15.7,4.5 -16.2,4 -16.2,1.7 -16.5,1.4 -18.4,1.4 -18.6,1.2 -18.6,-1.1 -18.5,-1.2
  region net VBAT: -13.3,-5.1 -15,-5.1 -15.2,-4.9 -18.4,-4.9 -18.6,-5.1 -18.6,-6 -18.4,-6.2 -16.9,-6.2 -16.5,-5.8 -13.3,-5.8
  region net GND: -13.3,-3.7 -14.5,-3.7 -15.2,-4.4 -18.4,-4.4 -18.6,-4.2 -18.6,-1.9 -18.4,-1.7 -13.6,-1.7 -13.3,-2
  region net NetC2_1: -12.7,-4.7 -12.2,-4.2 -12.2,-2.7 -11.6,-2.1 -10.2,-2.1 -9.7,-1.6 -9.7,4.1 -10.1,4.5 -11.8,4.5 -12.2,4.1 -12.2,-0.8 -12.7,-1.3 -12.7,-4.027 -12.973,-4.3 -13.6,-4.3 -13.6,-4.7

## Silkscreen, mask and mechanical layers (free items; w line width, h text height)
Top Overlay:
  text "+-" at 11.954,22.042 h1.27
  text "+5v" at -18.581,7.1 h1.52 r90
  text "+3.3v" at 18.811,1.5 h1.52 r90
  text "+    -" at 11.2,-13.527 h2.03
  text "IES-004-1" at 4.3,-21.09 h2.03
  text "EOS - Rev 1.1" at -18.5,-21.283 h1.52
Mechanical 1:
  circle w0.013: c0.025,-0.007 r3.5
  lines w0.013: -6.027,5.94 -5.923,-6.059 6.077,-5.954 5.972,6.045 -6.027,5.94
Mechanical 2:
  lines w0.013: -6.015,-0.007 -5.055,-0.007 ; -4.103,20.993 -2.515,20.993 0.025,20.993 ; -2.515,-0.007 0.025,-0.007 ; 0.025,-21.007 0.025,-18.467 ; 0.025,-6.047 0.025,-5.087 ; 0.025,-2.547 0.025,-0.007 ; 0.025,2.533 0.025,-0.007 ; 0.025,5.073 0.025,6.033 ; 0.025,16.866 0.025,18.453 0.025,20.993 ; 0.025,25.121 0.025,23.533 0.025,20.993 ; 2.565,-0.007 0.025,-0.007 ; 4.152,20.993 2.565,20.993 0.025,20.993 ; 5.105,-0.007 6.065,-0.007

## Text inside footprints (layer, text, board x,y; h text height)
U3: Top Overlay "*" at 13.8,-5.5 h1.27; Mechanical 13 "*" at 15.06,-6.961 h1.27